# Altium PCB KM_BD01.PcbDoc
Units mil, origin at the board's own origin, x right, y up, seen from the top; angles counter-clockwise.
Board outline 1574.8 x 2755.91 mil, 2 copper layers (Top Layer, Bottom Layer); 64 components, 49 nets, 250 pads, 21 vias.
Unrouted connection lines stored in the file: 78.
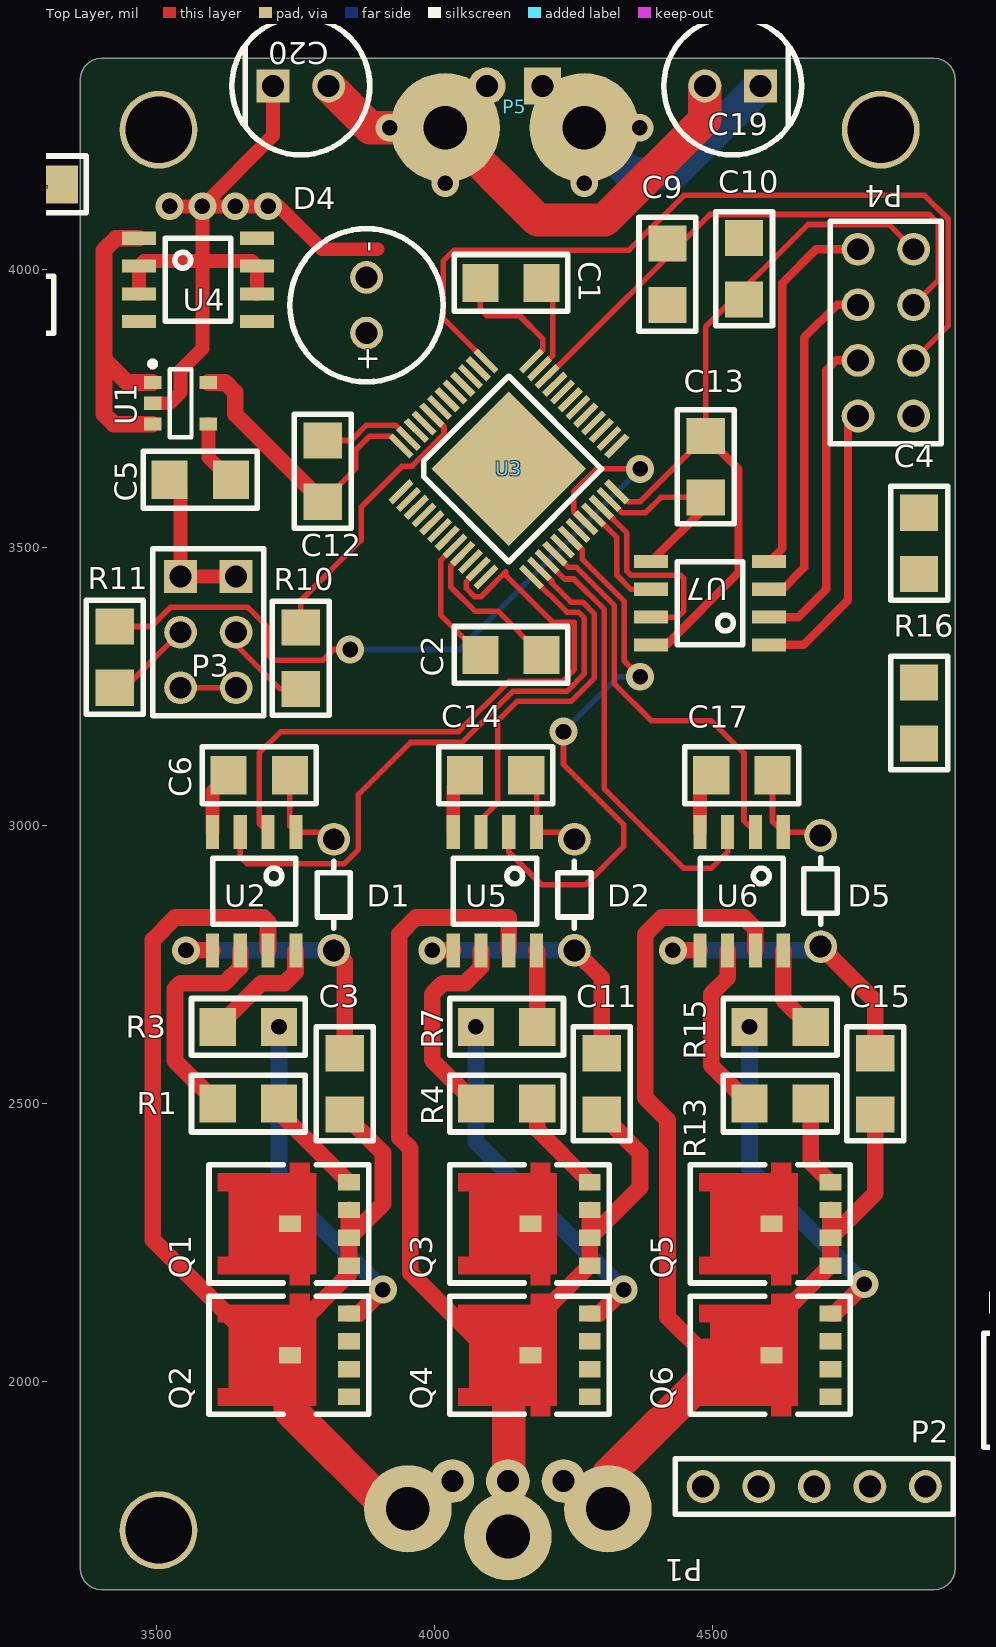
[diagram p0: Top Layer view]
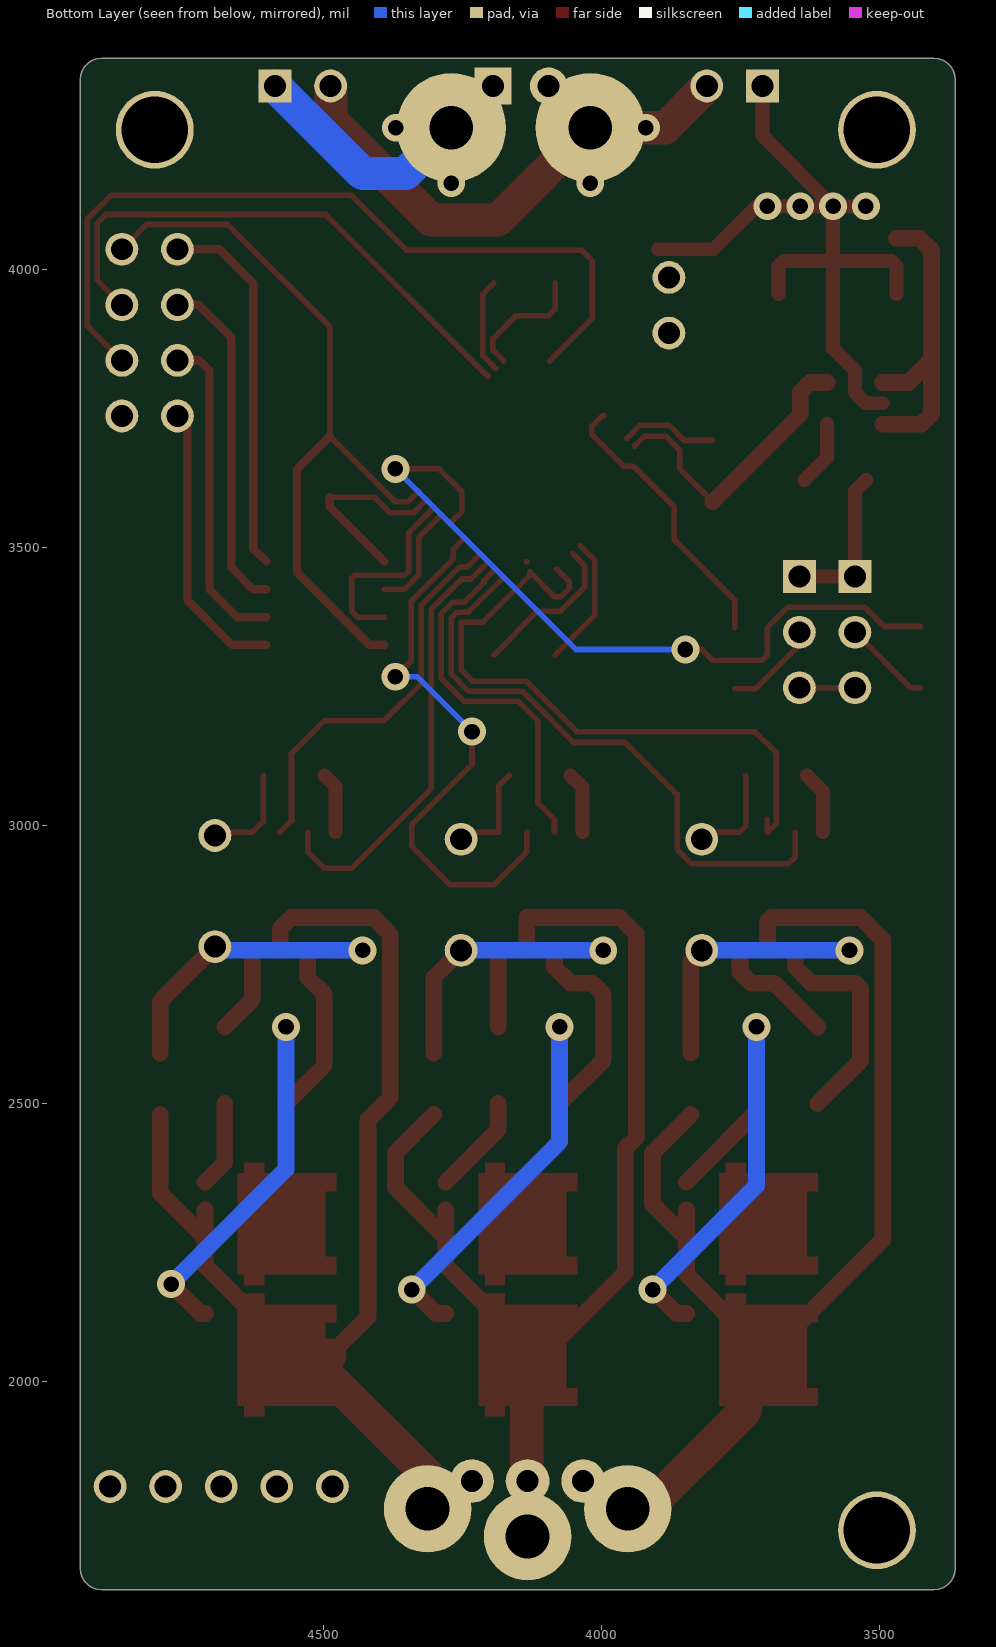
[diagram p1: Bottom Layer view, seen from below]

## Layer stack, top to bottom
Top Solder: solder mask 0.4, Solder Resist, Dk 3.5
Top Layer: signal copper 1.4
Dielectric 1: dielectric 12.6, FR-4, Dk 4.8
Bottom Layer: signal copper 1.4
Bottom Solder: solder mask 0.4, Solder Resist, Dk 3.5

## Board outline
4937.4,1664.37 4937.4,4341.54 4936.41,4350.3 4933.5,4358.62 4928.81,4366.08 4922.58,4372.32 4915.11,4377.01 4906.79,4379.92 4898.03,4380.91 3401.97,4380.91 3393.21,4379.92 3384.89,4377.01 3377.42,4372.32 3371.19,4366.08 3366.5,4358.62 3363.59,4350.3 3362.6,4341.54 3362.6,1664.37 3363.59,1655.61 3366.5,1647.29 3371.19,1639.82 3377.42,1633.59 3384.89,1628.9 3393.21,1625.99 3401.97,1625 4898.03,1625 4906.79,1625.99 4915.11,1628.9 4922.58,1633.59 4928.81,1639.82 4933.5,1647.29 4936.41,1655.61

## Design rules (kind name [scope] priority, off if disabled: settings)
Clearance Clearance_1 [All] p1: gap=10 ignorepadtopadclearanceinfootprint=FALSE except(0: Arc-Hole Track-Hole SMDPad-Hole THPad-Hole Via-Hole Fill-Hole Poly-Hole Region-Hole Text-Hole; 8: Arc-Arc Arc-Track Arc-SMDPad Track-Track Track-SMDPad SMDPad-SMDPad)
PolygonConnect [All] p1: connectstyle=Relief reliefconductorwidth=10 reliefentries=4 polygonreliefangle="90 Angle" airgapwidth=10
RoutingVias [All] p1: holewidth=28 width=50 viastyle="Through Hole" minholewidth=28 minwidth=50 maxholewidth=28 maxwidth=50
SolderMaskExpansion [All] p1: expansion=4
Width [All] p1: maxlimit=60 minlimit=10 preferedwidth=30
30 further rules are at their usual default settings.

## Components (designator, comment, footprint, x,y, rotation, side; value= is the part's Value field where it differs from the comment)
C1 "100nF" "SMD 1206 CAP" 4192.91,3976.38 r180 top
C2 "100nF" "SMD 1206 CAP" 4082.68,3307.09 r0 top
C3 "2.2µF" "SMD 1206 CAP" 3838.58,2590.55 r270 top
C4 "1µF" "SMD 1206 CAP" 4872.05,3452.76 r90 top
C5 "22nF" "SMD 1206 CAP" 3523.62,3622.05 r0 top
C6 "10µF" "SMD 1206 CAP" 3629.92,3090.55 r0 top
C7 "10µF" "SMD 1206 CAP" 5659.45,3492.13 r90 top
C8 "100nF" "SMD 1206 CAP" 5911.81,3412.76 r90 top
C9 "330nF" "SMD 1206 CAP" 4419.29,3937.01 r90 top
C10 "100nF" "SMD 1206 CAP" 4557.09,3946.85 r90 top
C11 "2.2µF" "SMD 1206 CAP" 4301.18,2590.55 r270 top
C12 "100nF" "SMD 1206 CAP" 3799.21,3692.91 r270 top
C13 "100nF" "SMD 1206 CAP" 4488.19,3590.55 r90 top
C14 "10µF" "SMD 1206 CAP" 4055.12,3090.55 r0 top
C15 "2.2µF" "SMD 1206 CAP" 4793.31,2590.55 r270 top
C16 "20pF" "SMD 1206 CAP" 5292.09,1776.77 r90 top
C17 "10µF" "SMD 1206 CAP" 4498.03,3090.55 r0 top
C18 "20pF" "SMD 1206 CAP" 6136.89,2633.07 r90 top
C19 "330µF" "THD 6.3x11 CAP" 4536.61,4330.71 r0 top
C20 "330µF" "THD 6.3x11 CAP" 3759.84,4330.71 r180 top
C21 "20pF" "SMD 1206 CAP" 2696.85,2783.46 r90 top
C22 "100nF" "SMD 1206 CAP" 5059.06,2312.99 r90 top
C23 "20pF" "SMD 1206 CAP" 3157.48,3937.01 r0 top
C24 "100nF" "SMD 1206 CAP" 3326.77,4153.54 r180 top
C25 "100nF" "SMD 1206 CAP" 3161.42,3779.53 r180 top
D1 "1N4148" DO-35 3818.9,2975.59 r270 top
D2 "1N4148" DO-35 4251.97,2975.59 r270 top
D4 "LED 3mm [RED]" "LED 3mm RED" 3877.95,3886.22 r90 top
D5 "1N4148" DO-35 4694.88,2982.28 r270 top
P1 "BLDC Terminal" "Universal 3-Phase Terminal" 4032.28,1820.87 r0 top
P2 "Encoder Terminal" PLS_5 4483.46,1811.02 r0 top
P3 "Header 3x2" "PLS_3x2 (Without legs)" 3543.31,3248.03 r90 top
P4 "Header 2x4 (I2C + SWD)" PLS_4x2 4862.2,4037.01 r270 top
P5 "Power Terminal" "Universal Power Terminal" 4094.49,4330.71 r0 top
Q1 "NTMFS4935NT1G" SO-8FL 3846.46,2283.46 r270 top
Q2 "NTMFS4935NT1G" SO-8FL 3846.46,2047.24 r270 top
Q3 "NTMFS4935NT1G" SO-8FL 4279.53,2283.46 r270 top
Q4 "NTMFS4935NT1G" SO-8FL 4279.53,2047.24 r270 top
Q5 "NTMFS4935NT1G" SO-8FL 4712.6,2283.46 r270 top
Q6 "NTMFS4935NT1G" SO-8FL 4712.6,2047.24 r270 top
R1 "100" "SMD 1206 RES" 3610.24,2500 r0 top
R2 "33k" "SMD 1206 RES" 6945,4210 r90 top
R3 "100" "SMD 1206 RES" 3610.24,2637.8 r0 top
R4 "100" "SMD 1206 RES" 4074.8,2500 r0 top
R6 "33k" "SMD 1206 RES" 5236.22,2314.96 r270 top
R7 "100" "SMD 1206 RES" 4185.04,2637.8 r180 top
R8 "510" "SMD 1206 RES" 5809.06,3120.08 r180 top
R9 "4.7k" "SMD 1206 RES" 5039.37,2039.37 r270 top
R10 "100K" "SMD 1206 RES" 3759.84,3356.3 r270 top
R11 "100K" "SMD 1206 RES" 3425.2,3248.03 r90 top
R12 "4.7k" "SMD 1206 RES" 5782.2,1914.57 r90 top
R13 "100" "SMD 1206 RES" 4566.93,2500 r0 top
R14 "33k" "SMD 1206 RES" 5354.33,2490.16 r90 top
R15 "100" "SMD 1206 RES" 4677.17,2637.8 r180 top
R16 "1M" "SMD 1206 RES" 4872.05,3147.64 r90 top
U1 "TPS79933DDCT" SOT95P245X110-5N 3543.31,3759.84 r0 top
U2 "IR2109" SOIC-8 3750.79,2988.19 r270 top
U3 "STM32F103C8T6" TQFP-48 4133.86,3641.73 r45 top
U4 "KF50BD-TR" "SOIC-8 (KF50BD-TR)" 3468.5,4056.69 r0 top
U5 "IR2109" SOIC-8 4183.86,2988.19 r270 top
U6 "IR2109" SOIC-8 4627.56,2988.19 r270 top
U7 "SI8600AC-B-IS" SOIC-8 4602.36,3325.2 r180 top
Y1 "32.768K" "SMD 0803-8P4" 2500,4094.49 r180 top
Y2 "8MHz" HC-49SM 2539.37,3464.57 r270 top

## Footprints (in the part's own frame and the unit in brackets; to place one, negate y for a bottom-side part, rotate by r counter-clockwise, add the part's x,y. Pads: shape width x height; smd on the part's side, far side on the other; paste and mask are expansions set on the pad)
DO-35 [mm]
  round 1.5 hole 1: 1(0,0) 2(5.08,0)
  silkscreen extent 1.02,-0.76 4.06,0.76, body extent -0.18,-0.76 5.27,0.76, height 1.51
HC-49SM [mm] "SMD version of HC-49S"
  rect 5.5x2 smd: 1(0,0) 2(9.5,0)
  silkscreen extent 0.5,-2.5 9,2.5, body extent -1.95,-2.4 11.45,2.4, height 4
"LED 3mm RED" [mm]
  round 1.5 hole 1.01: 1(0,0) 2(2.54,0)
  silkscreen extent -2.23,-3.5 4.77,3.5, body extent -1.68,-2.95 3.72,2.95, height 9.2
"PLS_3x2 (Without legs)" [mm]
  round 1.5 hole 1: 1(0,-2.54) 2(0,0) 3(2.54,-2.54) 4(2.54,0)
  rect 1.5x1.5 hole 1: 5(5.08,-2.54) 6(5.08,0)
  silkscreen extent -1.27,-3.81 6.35,1.27
PLS_4x2 [mm]
  round 1.5 hole 1: 1(0,0) 2(2.54,0) 3(5.08,0) 4(7.62,0) 5(0,-2.54) 6(2.54,-2.54) 7(5.08,-2.54) 8(7.62,-2.54)
  silkscreen extent -1.27,-3.81 8.89,1.27
PLS_5 [mm]
  round 1.5 hole 1: 1(0,0) 2(2.54,0) 3(5.08,0) 4(7.62,0) 5(10.16,0)
  silkscreen extent -1.27,-1.27 11.43,1.27, body extent -1.27,-10.03 11.43,0.32, height 2.5
"SMD 0803-8P4" [mm] "Oscillator"
  rect 1.3x1.9 smd: 1(0,-3.2) 2(5.5,-3.2) 3(5.5,0) 4(0,0)
  silkscreen extent -1.5,-3.2 7,0, body extent -1.2,-3.5 6.8,0.3, height 2.35
"SMD 1206 CAP" [mm]
  rect 1.65x1.75 smd: 1(0,0) 2(2.8,0)
  silkscreen extent -1.2,-1.3 4,1.3, body extent -0.4,-0.87 2.95,0.88, height 1
"SMD 1206 RES" [mm]
  rect 1.65x1.75 smd: 1(0,0) 2(2.8,0)
  silkscreen extent -1.2,-1.3 4,1.3, body extent -0.38,-0.85 2.92,0.85, height 0.65
SO-8FL [mm]
  rect 0.75x1 smd: 1(-1.905,0) 2(-0.635,0) 2(0.635,0) 2(1.905,0) 3(0,-2.7)
  Top Layer region: -2.31,-1.5 2.3,-1.5 2.3,-1.8 2.8,-1.8 2.8,-2.7 2.3,-2.7 2.3,-6 1.5,-6 1.5,-5.5 -1.5,-5.5 -1.5,-6 -2.31,-6 -2.31,-2.7 -2.8,-2.7 -2.8,-1.8 -2.31,-1.8
  silkscreen extent -2.7,-6.4 2.7,0.9, body extent -2.6,-5.75 2.6,0.35, height 0.95
SOIC-8 [mm]
  rect 1.55x0.6 smd: 1(0,0) 2(0,-1.27) 3(0,-2.54) 4(0,-3.81) 5(5.4,-3.81) 6(5.4,-2.54) 7(5.4,-1.27) 8(5.4,0)
  silkscreen extent 1.2,-3.8 4.2,0, body extent -0.46,-4.36 5.54,0.54, height 1.5
"SOIC-8 (KF50BD-TR)" [mm]
  rect 1.55x0.6 smd: 1(0,0) 2(0,-2.54) 2(0,-1.27) 2(5.4,-2.54) 2(5.4,-1.27) 3(0,-3.81) 4(5.4,-3.81) 5(5.4,0)
  silkscreen extent 1.2,-3.8 4.2,0, body extent -0.46,-4.35 5.54,0.55, height 1.5
SOT95P245X110-5N [mm] "SOT23, 5-Leads, Body 2,90x2,45mm, Pitch 0,95mm, IPC Medium Density"
  rect 0.8x0.6 smd: 1(-1.275,0.95) 2(-1.275,0) 3(-1.275,-0.95) 4(1.275,-0.95) 5(1.275,0.95)
  silkscreen extent -1.4,-1.55 0.5,1.92, body extent -1.5,-1.53 1.5,1.52, height 1.45
"THD 6.3x11 CAP" [mm]
  round 1.5 hole 1: 1(-1.27,0)
  rect 1.5x1.5 hole 1: 2(1.27,0)
  silkscreen extent -3.15,-3.15 3.15,3.15, body extent -3.4,-3.4 3.4,3.4, height 12.5
TQFP-48 [mm] "Microcontroller"
  rect 5x5 smd: 0(0,0)
  rect 1.35x0.29 smd: 1(-4.225,2.75) 2(-4.225,2.25) 3(-4.225,1.75) 4(-4.225,1.25) 5(-4.225,0.75) 6(-4.225,0.25) 7(-4.225,-0.25) 8(-4.225,-0.75) 9(-4.225,-1.25) 10(-4.225,-1.75) 11(-4.225,-2.25) 12(-4.225,-2.75) 25(4.225,-2.75) 26(4.225,-2.25) 27(4.225,-1.75) 28(4.225,-1.25) 29(4.225,-0.75) 30(4.225,-0.25) 31(4.225,0.25) 32(4.225,0.75) 33(4.225,1.25) 34(4.225,1.75) 35(4.225,2.25) 36(4.225,2.75)
  rect 0.29x1.35 smd: 13(-2.75,-4.225) 14(-2.25,-4.225) 15(-1.75,-4.225) 16(-1.25,-4.225) 17(-0.75,-4.225) 18(-0.25,-4.225) 19(0.25,-4.225) 20(0.75,-4.225) 21(1.25,-4.225) 22(1.75,-4.225) 23(2.25,-4.225) 24(2.75,-4.225) 37(2.75,4.225) 38(2.25,4.225) 39(1.75,4.225) 40(1.25,4.225) 41(0.75,4.225) 42(0.25,4.225) 43(-0.25,4.225) 44(-0.75,4.225) 45(-1.25,4.225) 46(-1.75,4.225) 47(-2.25,4.225) 48(-2.75,4.225)
  silkscreen extent -3,-3 3,3, body extent -4.6,-4.6 4.6,4.6, height 1.6
"Universal 3-Phase Terminal" [mm]
  round 4 hole 2: 1(-2.032,-1.27) 2(2.54,-2.54) 3(7.112,-1.27)
  round 2 hole 1: 1(0,0) 2(2.54,0) 3(5.08,0)
"Universal Power Terminal" [mm]
  round 5 hole 2: 1(-1.905,-1.905) 2(4.445,-1.905)
  round 1.7 hole 1: 1(0,0)
  rect 1.7x1.7 hole 1: 2(2.54,0)

## Part data
C1 C2 C8 C10 C12 C13 C22 C24 C25: "Capacitor 100nF [104]"
C3 C11 C15: "Capacitor 2.2µF [205]"
C4: "Capacitor 1µF [105]"
C5: "Capacitor 22nF [223]"
C6 C7 C14 C17: "Capacitor 10µF [106]"
C9: "Capacitor 330nF [334]"
C16 C18 C21 C23: "Capacitor 20pF"
C19 C20: "Capacitor 330µF [336]"
D1 D2 D5: "Fast diode"
P1: "3-pad terminal"
P2: "5-pin PLS terminal"
P3: "6-pin PLS terminal"
P4: "8-pin PLS terminal"
P5: "12V 2-pad terminal"
Q1 Q2 Q3 Q4 Q5 Q6: "Mosfet [OptiMOS]"
R1 R2 R3 R4 R6 R7 R8 R9 R10 R11 R12 R13 R14 R15 R16: "Resistor"
U1: "Linear Voltage Regulator (3.3V)"
U2 U5 U6: "Fast Half-Bridge Driver"
U3: "Microcontroller"
U4: "Linear Voltage Regulator (5V)"
U7: "Bidirectional I2C isolator"
Y1 Y2: "Oscillator"

## Free pads (board coordinates)
  round 140 hole 120 unplated: 3(3503.94,4251.97) 5(4803.15,4251.97) 6(3503.94,1732.28)

## Via types
v1: diameter 50, hole 28, Top Layer to Bottom Layer, 21 vias

## Nets (pads, with @x,y where several pads share a name; then routed paths per layer and width w, separated by ;. In a path a pad name is that pad's centre, name@x,y a point inside that pad or via, vN(x,y) a via of type N, cw(c..) or ccw(c..) an arc to the next point about the centre after c; other vN are vias at no path point)
BOOT0: R10.1 U3.44 | length 509.8
  Top Layer w10: R10.1 3759.84,3405.51 3868.11,3513.78 3868.11,3572.83 3942.24,3646.97 3959.82,3646.97 4017.27,3704.41 4017.27,3717.94 3998.12,3737.09 3995.36,3737.09 U3.44
BOOT1: R11.2 U3.20 | length 1373.9
  Top Layer w10: R11.2 3490.57,3358.27 3524.86,3392.56 3664.53,3392.56 3700.79,3356.3 3700.79,3307.09 3710.63,3297.24 3799.21,3297.24 3818.9,3316.93 v1(3848.43,3316.93) ; 4133.34,3474.93 4134.37,3474.93 ; U3.20 4272.36,3545.99 4271.98,3546.37 4269.6,3546.37 4250.45,3565.52 4250.45,3600.74 4291.44,3641.73 v1(4370.08,3641.73)
  Bottom Layer w10: v1(3848.43,3316.93) 4045.28,3316.93 v1(4370.08,3641.73)
GND: C1.1 C2.1 C4.1 C5.1 C6.1 C7.1 C8.1 C9.1 C10.2 C12.1 C13.1 C14.1 C16.1 C17.1 C18.1 C19.2 C20.2 C21.1 C22.1 C23.1 C24.1 C25.1 P2.4 P3.5 P3.6 P4.4 P5.2 Q2.2 Q4.2 Q6.2 R2.1 R6.1 R8.2 R9.1 R12.1 R14.1 U1.2 U2.4 U3.8 U3.23 U3.35 U3.47 U4.2 U5.4 U6.4 U7.5 | length 3375.8
  Top Layer w10: C12.1 3850.39,3692.91 3877.95,3720.47 3929.84,3720.47 U3.47 ; U3.8 4011.13,3477.24 4011.13,3378.63 C2.1 ; U3.35 4212.6,3845.75 4212.6,3956.69 C1.1 ; U3.23 4337.87,3562.99 4379.92,3562.99 4407.48,3590.55 C13.1
  Top Layer w15: U7.5 4488.19,3573.62 C13.1
  Top Layer w25: U4.2@3468.5,3956.69 3468.5,4006.69 3477.56,4015.75 3582.68,4015.75 ; U1.2 3523.62,3759.84 3543.31,3779.53 3543.31,3818.9 3582.68,3858.27 3582.68,4015.75 ; C5.1 3543.31,3602.36 P3.6 P3.5 ; v1(3523.62,4114.17) v1(3582.68,4114.17) ; U2.4 3600.79,3061.42 C6.1 ; U4.2@3681.1,3956.69 3681.1,4006.69 3672.05,4015.75 3582.68,4015.75 ; C20.2 3709.84,4241.34 v1(3582.68,4114.17) ; 3897.64,4037.01 3797.64,4037.01 3720.47,4114.17 v1(3700.79,4114.17) v1(3641.73,4114.17) v1(3582.68,4114.17) ; U5.4 4033.86,3069.29 C14.1 ; U6.4 4477.56,3070.08 C17.1 ; 3582.68,4015.75 v1(3582.68,4114.17)
  Bottom Layer w60: P5.2@4269.49,4255.71 4351.97,4173.23 4429.13,4173.23 C19.2
  other v1: 4269.49,4155.71 4369.49,4255.71
NetC3_1: C3.1 D1.2 U2.5 | length 506.6
  Top Layer w30: v1(3553.15,2775.59) U2.5 ; D1.2 3838.58,2755.91 C3.1
  Bottom Layer w30: v1(3553.15,2775.59) D1.2
NetC5_2: C5.2 U1.4 | length 117.1
  Top Layer w25: U1.4 3593.5,3662.4 C5.2
NetC11_1: C11.1 D2.2 U5.5 | length 499.1
  Top Layer w30: v1(3996.06,2775.59) U5.5 ; D2.2 4301.18,2726.38 C11.1
  Bottom Layer w30: v1(3996.06,2775.59) D2.2
NetC15_1: C15.1 D5.2 U6.5 | length 546.7
  Top Layer w30: v1(4429.13,2775.59) U6.5 ; D5.2 4793.31,2683.86 C15.1
  Bottom Layer w30: v1(4429.13,2775.59) D5.2@4694.88,2775.59
NetD4_2: D4.2 R8.1
NetP3_3: P3.3 R10.2 | length 172.1
  Top Layer w10: P3.3 3643.31,3325.2 3722.44,3246.06 R10.2
NetP3_4: P3.4 R11.1 | length 159.5
  Top Layer w10: R11.1 3443.31,3248.03 P3.4
NetP4_5: P4.5 U7.4 | length 672.3
  Top Layer w15: U7.4 4625.98,3498.82 4625.98,3976.38 4686.61,4037.01 P4.5
NetP4_6: P4.6 U7.3 | length 614
  Top Layer w15: U7.3 4625.98,3425.2 4665.35,3464.57 4665.35,3877.95 4724.41,3937.01 P4.6
NetP4_7: P4.7 U7.2 | length 581.8
  Top Layer w15: U7.2 4654.72,3375.2 4704.72,3425.2 4704.72,3818.9 4722.83,3837.01 P4.7
NetP4_8: P4.8 U7.1 | length 514
  Top Layer w15: U7.1 4663.78,3325.2 4744.09,3405.51 4744.09,3718.9 P4.8
NetQ1_1: Q1.1 R1.2 | length 193.7
  Top Layer w30: R1.2 3720.47,2484.45 Q1.1
NetQ2_1: Q2.1 R3.2 | length 628.8
  Top Layer w30: Q2.1 3864.37,2122.24 v1(3907.48,2165.35)
  Bottom Layer w30: v1(3720.47,2637.8) 3720.47,2352.36 v1(3907.48,2165.35)
NetQ3_1: Q3.1 R4.2 | length 180.7
  Top Layer w30: R4.2 4185.04,2452.95 Q3.1
NetQ4_1: Q4.1 R7.2 | length 661.4
  Top Layer w30: Q4.1 4297.44,2122.24 v1(4340.55,2165.35)
  Bottom Layer w30: v1(4074.8,2637.8) 4074.8,2431.1 v1(4340.55,2165.35)
NetQ5_1: Q5.1 R13.2 | length 156.2
  Top Layer w30: R13.2 4677.17,2393.9 Q5.1
NetQ6_1: Q6.1 R15.2 | length 631.2
  Top Layer w30: Q6.1 4720.67,2122.24 v1(4773.62,2175.2)
  Bottom Layer w30: v1(4566.93,2637.8) 4566.93,2381.89 v1(4773.62,2175.2)
NetR1_1: R1.1 U2.6 | length 402.1
  Top Layer w30: R1.1 3533.46,2576.77 3533.46,2706.69 3543.31,2716.54 3622.05,2716.54 3650.79,2745.28 U2.6
NetR3_1: R3.1 U2.8 | length 220.2
  Top Layer w30: R3.1 3688.98,2716.54 3730.32,2716.54 3750,2736.22 3750,2774.8 U2.8
NetR4_1: R4.1 U5.6 | length 367.6
  Top Layer w30: R4.1 3996.06,2578.74 3996.06,2696.85 4015.75,2716.54 4055.12,2716.54 4083.86,2745.28 U5.6
NetR7_1: R7.1 U5.8 | length 138.3
  Top Layer w30: U5.8 4185.04,2774.41 R7.1
NetR13_1: R13.1 U6.6 | length 316.4
  Top Layer w30: U6.6 4527.56,2726.38 4498.03,2696.85 4498.03,2568.9 R13.1
NetR15_1: R15.1 U6.8 | length 158.3
  Top Layer w30: U6.8 4627.56,2687.4 R15.1
OSCIN: C21.2 R16.2 U3.5 Y2.1
OSCOUT: C23.2 R16.1 U3.6 Y2.2
PA1: U2.2 U3.11 | length 1194.1
  Top Layer w10: U2.2@3700.79,3011.81 U2.2 3684.83,3004.14 3684.83,3130.38 3723.74,3169.29 4043.58,3169.29 4133.92,3259.64 4230.78,3259.64 4251.97,3280.83 4251.97,3366.14 4212.6,3366.14 4128.62,3450.12 4128.62,3456.93 4083.43,3411.73 4072.66,3411.73 4056.97,3427.42 4056.97,3438.19 4080.26,3461.48 U3.11
PA3: U2.3 U3.13 | length 1094.7
  Top Layer w10: U2.3 3650.79,2943.7 3663.43,2931.06 3837.34,2931.06 3863.43,2957.15 3863.43,3056.34 3956.69,3149.61 4049.35,3149.61 4130.97,3231.23 4141.38,3241.64 4238.23,3241.64 4269.97,3273.37 4269.97,3373.6 4259.42,3384.14 4238.34,3384.14 U3.13
PA4: U3.14 U5.3 | length 669.6
  Top Layer w10: U5.3 4083.86,3011.02 4114.17,3041.34 4114.17,3188.98 4148.83,3223.64 4245.69,3223.64 4287.97,3265.92 4287.97,3381.05 4266.88,3402.14 4245.79,3402.14 4210.75,3437.18 4210.75,3440.95 4191.6,3460.09 4188.84,3460.09 U3.14
PA5: U3.15 U6.3 | length 790.1
  Top Layer w10: U3.15 4234.45,3443.7 4250.77,3443.7 4305.97,3388.51 4305.97,3066.08 4448.82,2923.23 4498.03,2923.23 4527.56,2952.76 U6.3
PA6: U3.16 U6.2 | length 721.9
  Top Layer w10: U3.16 4241.43,3464.57 4255.37,3464.57 4323.97,3395.96 4323.97,3255.21 4390.2,3188.98 4498.03,3188.98 4557.09,3129.92 4557.09,3008.66 U6.2
PB0: U3.18 U5.2 | length 1028.3
  Top Layer w10: U5.2 4133.86,2952.76 4192.91,2893.7 4271.65,2893.7 4340.55,2962.6 4340.55,3001.97 4232.27,3110.24 v1(4232.27,3169.28) ; U3.18 4244.52,3515.77 4247.28,3515.77 4266.43,3496.63 4266.43,3478.96 4341.97,3403.42 4341.97,3295.83 v1(4370.08,3267.72)
  Bottom Layer w10: v1(4232.27,3169.28) 4330.71,3267.72 v1(4370.08,3267.72)
PB10/SCL2: U3.21 U7.6 | length 199.4
  Top Layer w10: U3.21 4286.28,3557.53 4289.04,3557.53 4328.25,3518.32 4328.25,3450.55 4353.6,3425.2 U7.6
PB11/SDA2: U3.22 U7.7 | length 364.4
  Top Layer w10: U3.22 4346.25,3526.77 4346.25,3458 4353.87,3450.39 4443.31,3450.39 4448.82,3444.88 4448.82,3385.83 4438.19,3375.2 U7.7
PB13: P2.2 R9.2 U3.26
PB14: P2.3 R12.2 U3.27
PC14: C16.2 U3.3 Y1.1
PC15: C18.2 U3.4 Y1.4
PHASE_A: C3.2 P1.1 Q1.2 Q2.3 R2.2 U2.7 | length 2116.1
  Top Layer w30: U2.7 3700.79,2826.62 3692.76,2834.65 3533.46,2834.65 3493.46,2794.65 3493.46,2254.57 3700.79,2047.24 Q2.3 3740.16,2086.61 3846.46,2192.91 3846.46,2208.46 Q1.2@3846.46,2258.46 ; C3.2 3907.48,2411.42 3907.48,2319.49 Q1.2@3846.46,2258.46 ; Q1.2@3846.46,2308.46 Q1.2@3846.46,2258.46
  Top Layer w60: Q2.3 3740.16,1948.82 3918.11,1770.87 P1.1@3952.28,1770.87
PHASE_B: C11.2 P1.2 Q3.2 Q4.3 R6.2 U5.7 | length 2236.7
  Top Layer w30: P1.2@4132.28,1720.87 4133.86,1722.44 P1.2@4173.23,1761.81 ; 4133.86,2007.87 Q4.3 ; U5.7 4133.86,2834.65 3966.54,2834.65 3937.01,2805.12 3937.01,2438.46 3956.69,2418.77 3956.69,2194.88 4104.33,2047.24 4133.86,2047.24 Q4.3 ; Q3.2@4279.53,2308.46 Q3.2@4279.53,2258.46 ; C11.2 4370.08,2411.42 4370.08,2349.02 Q3.2@4279.53,2258.46 ; Q4.3 4173.23,2102.17 4279.53,2208.46 Q3.2@4279.53,2258.46
  Top Layer w60: P1.2@4133.86,1720.87 4133.86,1722.44 4133.86,2007.87 4133.86,2047.24 4133.86,2086.61
PHASE_C: C15.2 P1.3 Q5.2 Q6.3 R14.2 U6.7 | length 2104.5
  Top Layer w30: 4507.87,2027.56 4488.19,2047.24 4419.29,2116.14 4419.29,2470.47 4379.13,2510.63 4379.13,2804.33 4409.45,2834.65 4557.09,2834.65 4577.56,2814.17 U6.7 ; Q6.3 4606.3,2102.17 4712.6,2208.46 Q5.2@4712.6,2258.46 ; Q5.2@4712.6,2308.46 Q5.2@4712.6,2258.46 ; C15.2 4793.31,2339.17 Q5.2@4712.6,2258.46
  Top Layer w60: P1.3@4312.28,1770.87 4312.28,1831.97 4507.87,2027.56 ; 4488.19,2047.24 Q6.3
SWDCLK: P4.3 U3.37 | length 1467.3
  Top Layer w10: U3.37 4015.75,3912.96 4015.75,4015.75 4035.43,4035.43 4350.39,4035.43 4448.82,4133.86 4881.89,4133.86 4924.73,4091.02 4924.73,3899.54 P4.3
SWDIO: P4.2 U3.34 | length 997.1
  Top Layer w10: U3.34 4202.76,3809.45 4205.52,3809.45 4495.61,4099.54 4890.76,4099.54 4906.73,4083.56 4906.73,3981.54 P4.2
VCC: C24.2 C25.2
VCC3V3: C1.2 C2.2 C7.2 C8.2 C12.2 C13.2 C22.2 P2.5 P3.1 P3.2 P4.1 U1.5 U3.9 U3.24 U3.36 U3.48 U7.8 | length 2515.2
  Top Layer w10: P3.2 P3.1 ; C12.2 3858.27,3641.73 3858.27,3675.33 3883.72,3700.79 3921.69,3700.79 U3.48 ; U3.9 4029.13,3467.41 4029.13,3429.8 4073.1,3385.83 4114.17,3385.83 C2.2 ; C1.2 4082.68,3929.13 4094.49,3917.32 4153.54,3917.32 4194.6,3876.27 4194.6,3855.59 U3.36 ; U3.24@4328.03,3602.36 4347.72,3582.68 4370.08,3582.68 C13.2 4488.19,3897.64 4672.09,4081.54 4817.68,4081.54 P4.1 P4.1@4862.2,4041.2
  Top Layer w15: U7.8 4417.18,3325.2 4547.24,3455.26 4547.24,3641.73 C13.2
  Top Layer w30: U1.5 3624.02,3797.24 3641.73,3779.53 3641.73,3740.16 C12.2
VCC5V: C4.2 C10.1 P2.1 U1.1 U1.3 U4.1 | length 566.7
  Top Layer w30: U4.1 3426.77,4056.69 3405.51,4035.43 3405.51,3838.58 ; U1.3 3423.23,3722.44 3405.51,3740.16 3405.51,3838.58 ; U1.1 3446.85,3797.24 3405.51,3838.58
VCC12V: C6.2 C9.2 C14.2 C17.2 C19.1 C20.1 D1.1 D2.1 D4.1 D5.1 P5.1 Q1.3 Q3.3 Q5.3 U2.1 U4.5 U5.1 U6.1 | length 1455.6
  Top Layer w10: C6.2 3740.16,2998.82 U2.1 3806.3,2988.19 D1.1 ; C14.2 4183.86,3072.05 U5.1 4239.37,2988.19 D2.1 ; C17.2 4608.27,3007.48 U6.1 4688.98,2988.19 D5.1
  Top Layer w30: v1(3919.49,4255.71) P5.1@4019.49,4255.71
  Top Layer w60: C20.1 3884.84,4255.71 v1(3919.49,4255.71) ; P5.1@4019.49,4255.71 4185.54,4089.66 4306.19,4089.66 4486.61,4270.08 C19.1
  other v1: 4019.49,4155.71
pads on no net: U3.0 U3.1 U3.2 U3.7 U3.10 U3.12 U3.17 U3.19 U3.25 U3.28 U3.29 U3.30 U3.31 U3.32 U3.33 U3.38 U3.39 U3.40 U3.41 U3.42 U3.43 U3.45 U3.46 U4.3 U4.4 Y1.2 Y1.3

## Silkscreen, mask and mechanical layers (free items; w line width, h text height)
Mechanical 1:
  the board outline again, w7.87

## Text inside footprints (layer, text, board x,y; h text height)
D4: Top Overlay "+" at 3897.95,3816.22 h40 r90; Top Overlay "-" at 3897.95,4031.22 h40 r90